# Altium PCB PCB_Microfonos.PcbDoc
Units mm, origin at the board's own origin, x right, y up, seen from the top; angles counter-clockwise.
Board outline 50 x 50 mm, 2 copper layers (Top Layer, Bottom Layer); 36 components, 19 nets, 90 pads, 10 vias.
Unrouted connection lines stored in the file: 4.
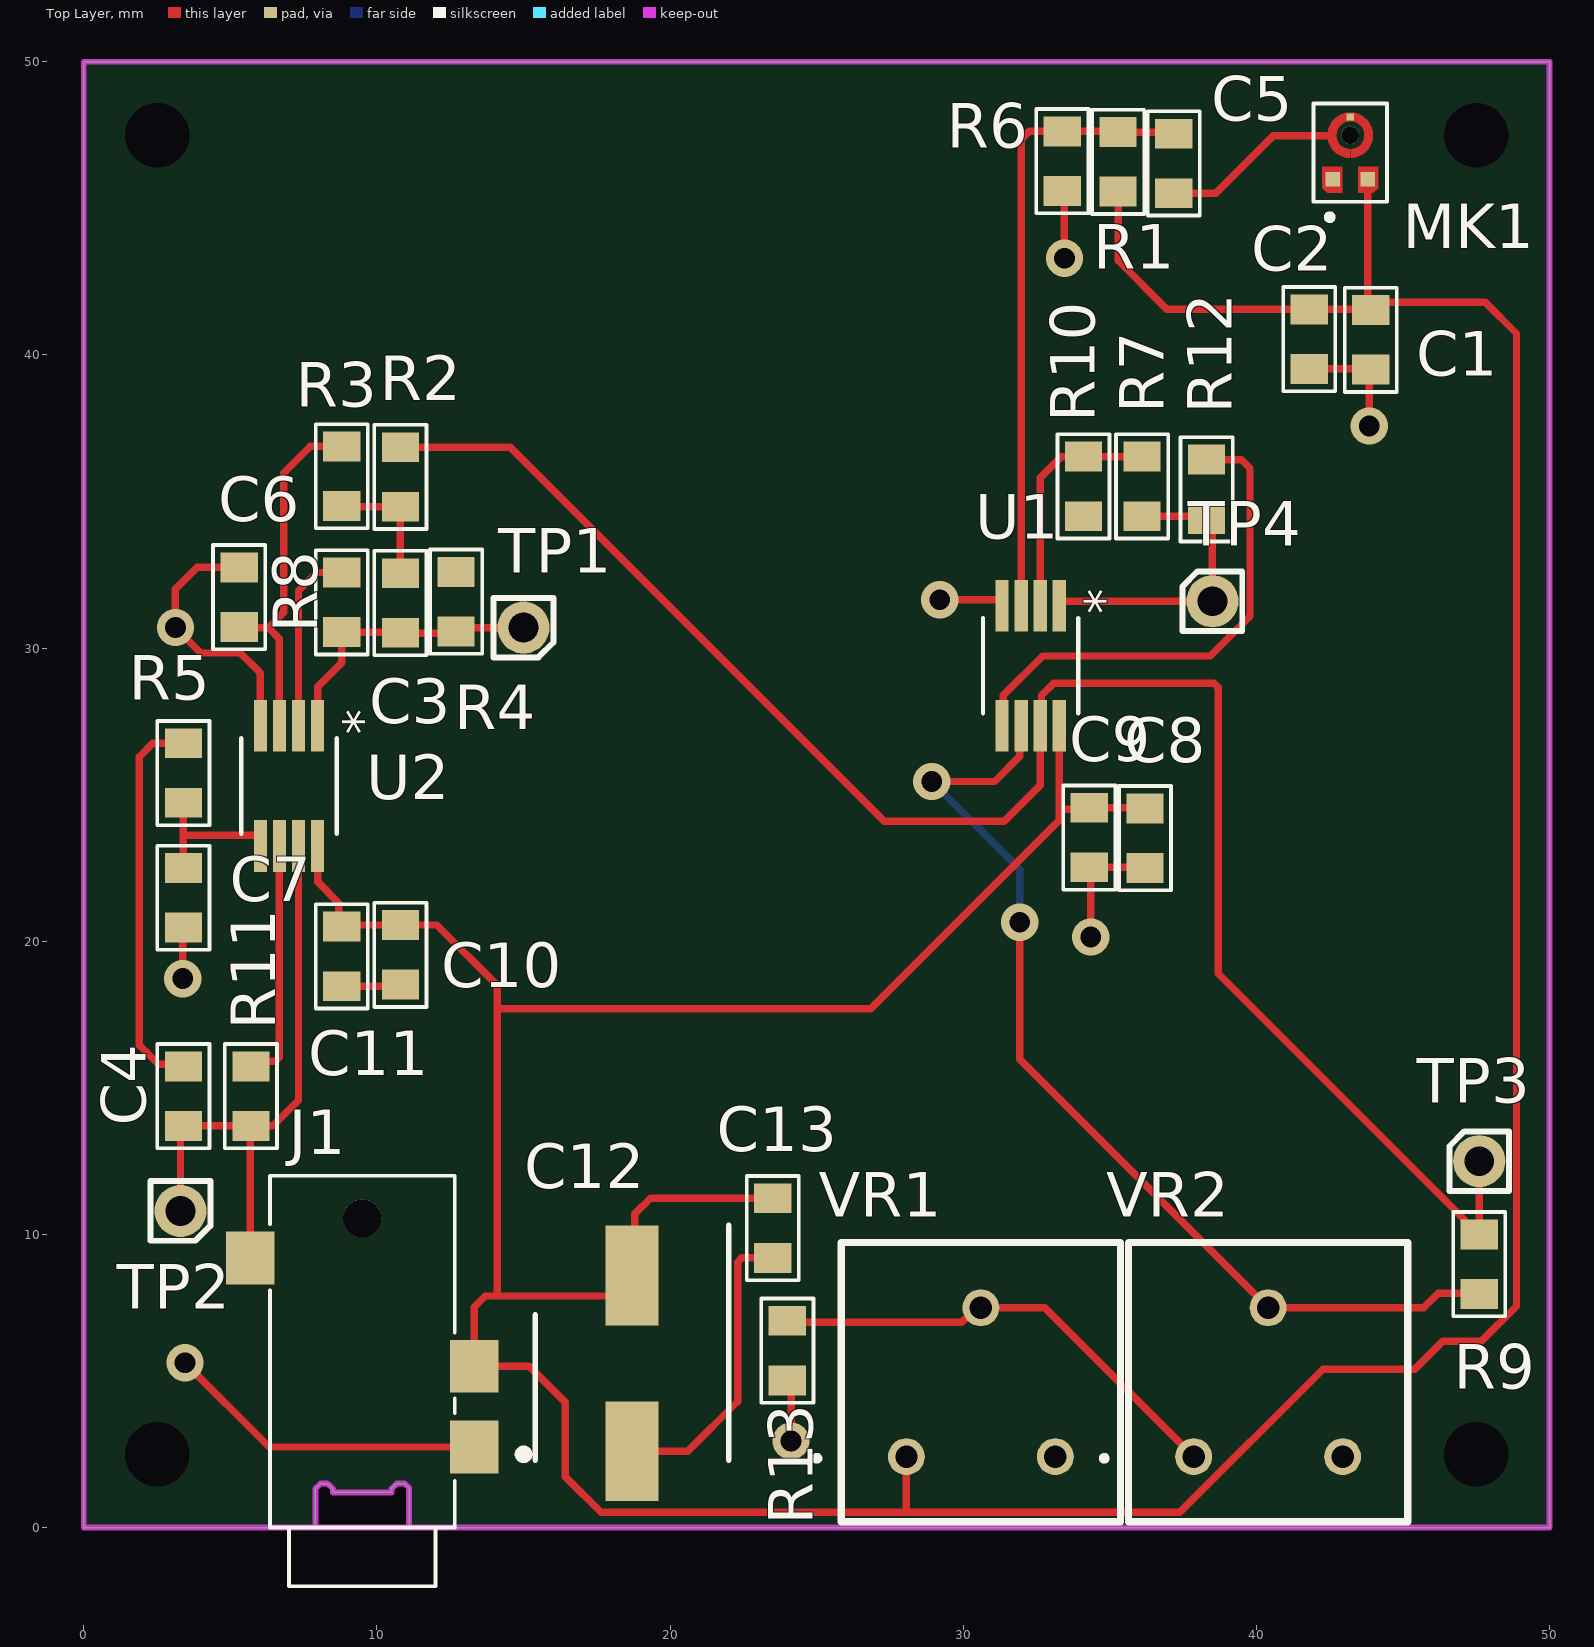
[diagram p0: Top Layer view]
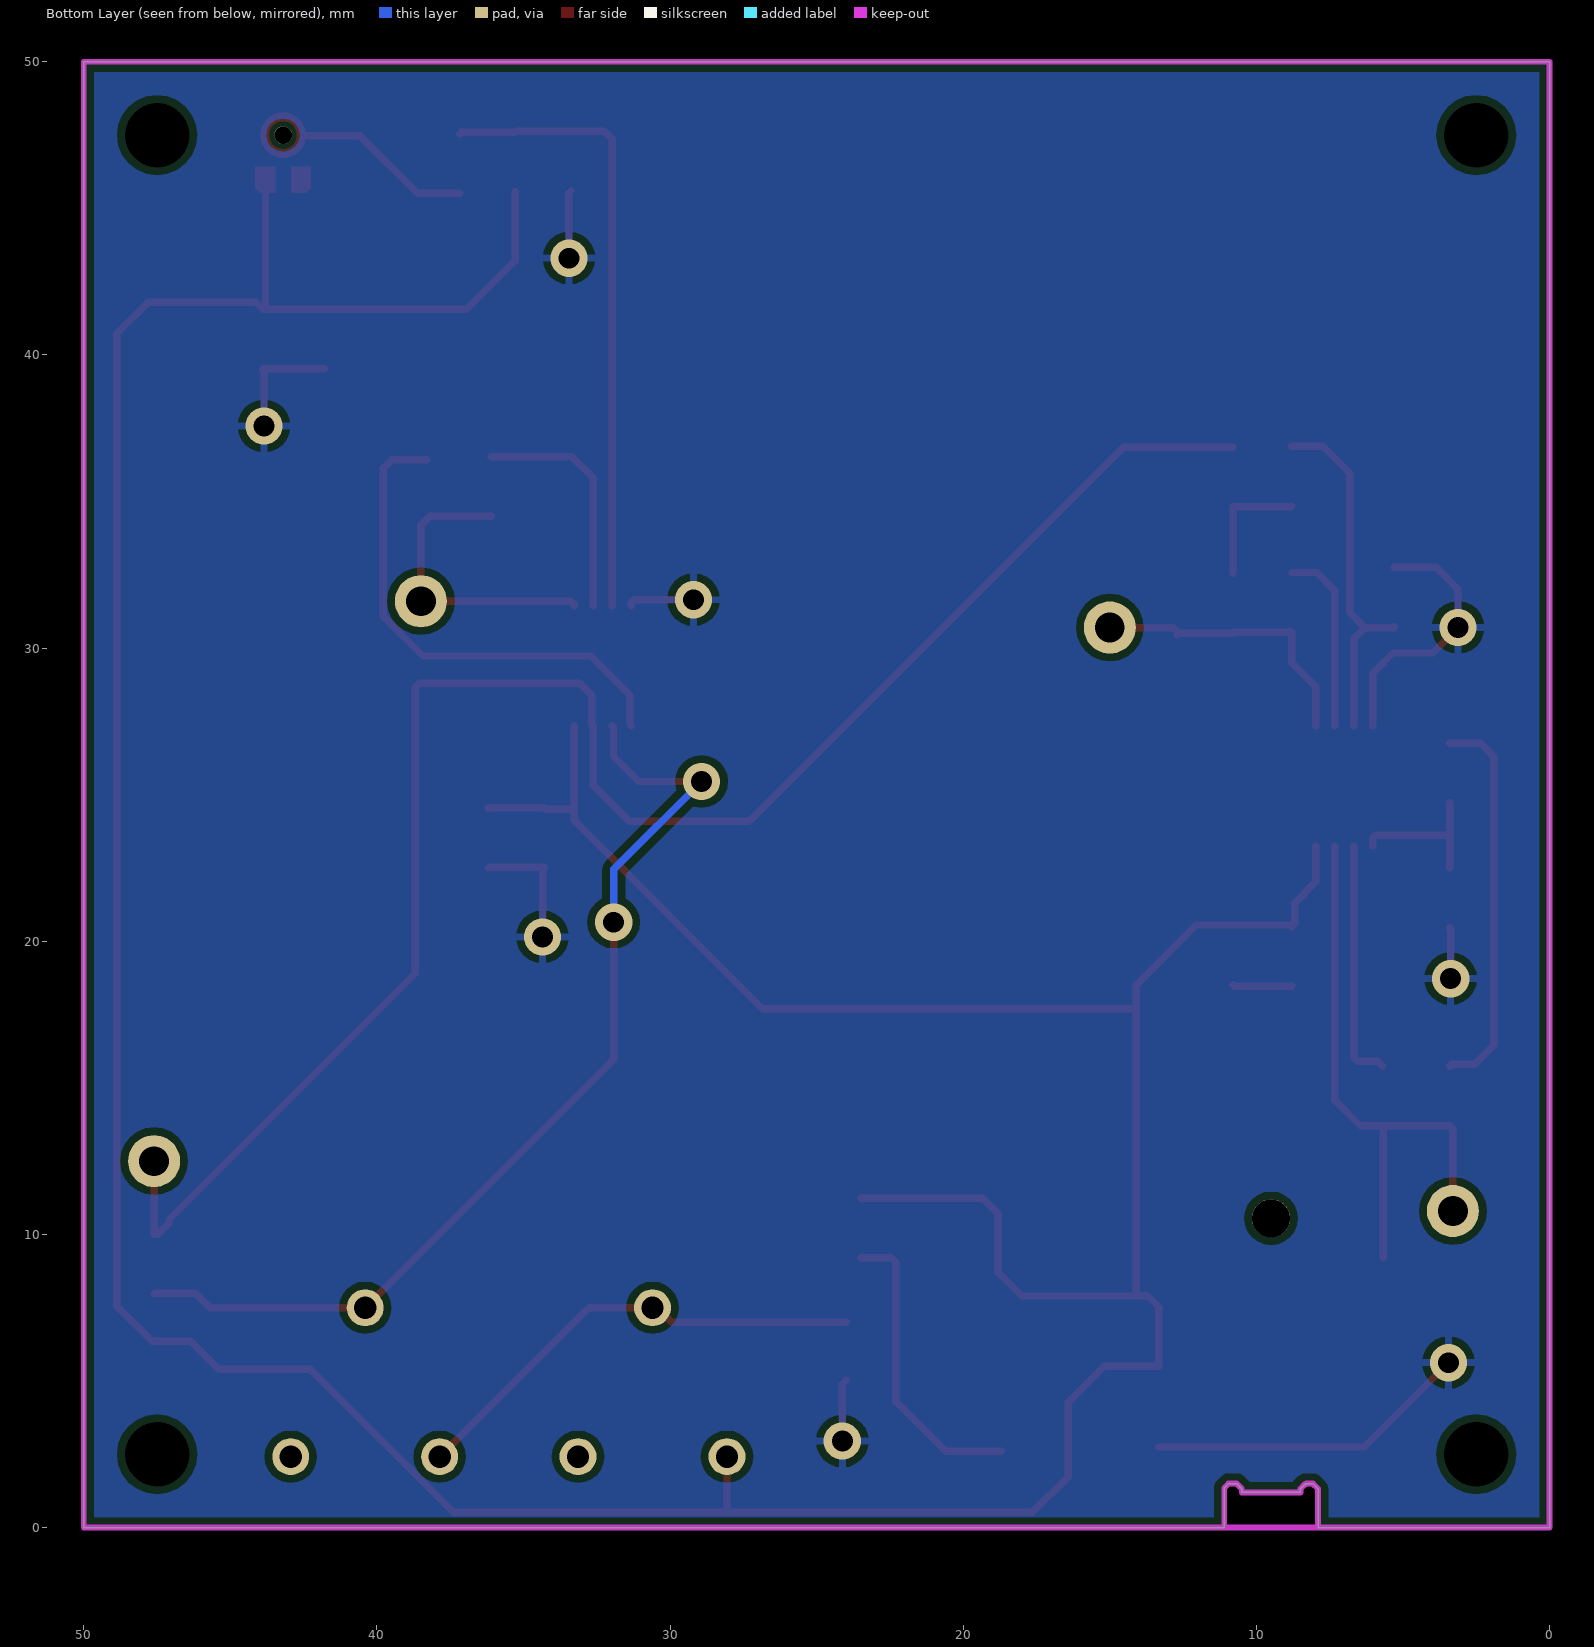
[diagram p1: Bottom Layer view, seen from below]

## Layer stack, top to bottom
Top Solder: solder mask 0.0102, Solder Resist, Dk 3.5
Top Layer: signal copper 0.0356
Dielectric 1: dielectric 0.32, FR-4, Dk 4.8
Bottom Layer: signal copper 0.0356
Bottom Solder: solder mask 0.0102, Solder Resist, Dk 3.5

## Board outline
10.5,1.2 10.5,1.325 10.675,1.5 10.95,1.5 11.1,1.35 11.1,0 50,0 50,50 0,50 0,0 7.9,0 7.9,1.325 8.075,1.5 8.3,1.5 8.325,1.475 8.35,1.475 8.5,1.325 8.5,1.2

## Design rules (kind name [scope] priority, off if disabled: settings)
Clearance [All] p1: gap=0.254 ignorepadtopadclearanceinfootprint=FALSE except(0: Arc-Hole Track-Hole SMDPad-Hole THPad-Hole Via-Hole Fill-Hole Poly-Hole Region-Hole Text-Hole)
HoleSize [All] p1: absolutevalues=TRUE maxlimit=6.3 minlimit=0.2 maxpercent=80.000 minpercent=20.000
PolygonConnect [All] p1: connectstyle=Relief reliefconductorwidth=0.254 reliefentries=4 polygonreliefangle="90 Angle" airgapwidth=0.254
RoomDefinition MICROFONO [InComponentClass('MICROFONO')] p1: confinementstyle=ConfineIn formatcopy=TRUE lockcomponents=FALSE outline 51.1,43.6 66.1,43.6 66.1,50.1 51.1,50.1
RoomDefinition "FILTRADO Y AMPLIFICACION" [InComponentClass('FILTRADO Y AMPLIFICACION')] p2: confinementstyle=ConfineIn formatcopy=TRUE lockcomponents=FALSE outline 51.1,29.1 221.1,29.1 221.1,42.6 51.1,42.6
RoomDefinition CONECTOR [InComponentClass('CONECTOR')] p3: confinementstyle=ConfineIn formatcopy=TRUE lockcomponents=FALSE outline 51.1,1.6 81.1,1.6 81.1,27.6 51.1,27.6
RoutingVias [All] p1: holewidth=0.711 width=1.27 viastyle="Through Hole" minholewidth=0.2 minwidth=0.45 maxholewidth=0.711 maxwidth=1.27
SolderMaskExpansion [All] p1: expansion=0.102 istentingtop=FALSE
Width [All] p1: maxlimit=0.254 minlimit=0.127 preferedwidth=0.254
29 further rules are at their usual default settings.

## Classes and differential pairs
component class MICROFONO: C1 C2 MK1
component class "FILTRADO Y AMPLIFICACION": C3 C4 C5 C6 C7 C8 C9 C10 C11 R1 R2 R3 R4 R5 R6 R7 R8 R9 R10 R11 R12 R13 TP1 TP2 TP3 TP4 U1 U2 VR1 VR2
component class CONECTOR: C12 C13 J1

## Components (designator, comment, footprint, x,y, rotation, side; value= is the part's Value field where it differs from the comment)
C1 "100nF" 0805C-TBD 43.9,41.278 r270 top
C2 "100p" 0805C-GENERIC 41.8,41.3 r270 top
C3 "3.6n" 0805C-GENERIC 10.8,32.3 r270 top
C4 "5.6n" 0805C-GENERIC 3.4,15.478 r270 top
C5 "3u" 0805C-GENERIC 37.18,45.77 r90 top
C6 "360p" 0805C-GENERIC 5.3,32.5 r270 top
C7 "470p" 0805C-GENERIC 3.4,20.722 r90 top
C8 "100n" 0805C-GENERIC 36.2,24.278 r270 top
C9 "100p" 0805C-GENERIC 34.3,24.3 r270 top
C10 "100n" 0805C-GENERIC 10.8,20.3 r270 top
C11 "100p" 0805C-GENERIC 8.8,20.246 r270 top
C12 "EEE-HC1C101XP" CAPAE660X800N 18.7,5.6 r270 top
C13 "10u" 0805C-GENERIC 23.5,10.978 r270 top
J1 "SJ2-35953A-SMT-TR" CUI_SJ2-35953A-SMT-TR 9.5,6 r90 top
MK1 "INMP510" XDCR_INMP510 43.2,46.9 r90 top
R1 "110k" 0805R-GENERIC 35.28,45.824 r90 top
R2 "1.6k" 0805R-GENERIC 10.8,36.6 r270 top
R3 "47k" 0805R-GENERIC 8.8,35.1 r90 top
R4 "5.1k" 0805R-GENERIC 12.7,30.822 r90 top
R5 "5.1k" 0805R-GENERIC 3.4,26.5 r270 top
R6 "1.8k" 0805R-GENERIC 33.38,47.37 r270 top
R7 "62k" 0805R-GENERIC 36.1,34.754 r90 top
R8 "51k" 0805R-GENERIC 8.8,30.8 r90 top
R9 "20k" 0805R-GENERIC 47.6,9.746 r270 top
R10 "2k" 0805R-GENERIC 34.1,36.278 r270 top
R11 "10k" 0805R-GENERIC 5.7,13.954 r90 top
R12 "5.6k" 0805R-GENERIC 38.3,36.178 r270 top
R13 "820" 0805R-GENERIC 24,6.8 r270 top
TP1 "LPFE1" TESTPIN 15,30.7 r180 top
TP2 "LPFE2" TESTPIN 3.3,10.8 r180 top
TP3 "AMP" TESTPIN 47.6,12.5 r0 top
TP4 "HPF" TESTPIN 38.5,31.6 r0 top
U1 "Part Number: ADA4661-2ARMZ-R7" RM_8 32.3,29.4 r270 top value=Value
U2 "Part Number: ADA4661-2ARMZ-R7" RM_8 7,25.3 r270 top value=Value
VR1 "3310Y-001-102L" 3310Y-001 30.6,4.96 r0 top
VR2 "3310Y-001-103L" 3310Y-001 40.4,4.96 r0 top

## Footprints (in the part's own frame and the unit in brackets; to place one, negate y for a bottom-side part, rotate by r counter-clockwise, add the part's x,y. Pads: shape width x height; smd on the part's side, far side on the other; paste and mask are expansions set on the pad)
0805C-GENERIC [mil] "CAPACITOR 0805"
  rect 40x50 smd: 1(-10,0) 2(70,0)
  silkscreen extent -40,-35 100,35, body extent -11,-25 70,25, height 26
0805C-TBD [mil] "CAPACITOR 0805"
  rect 40x50 smd: 1(-10,0) 2(70,0)
  silkscreen extent -40,-35 100,35, body extent -11,-25 70,25, height 26
0805R-GENERIC [mil] "RESISTOR 0805"
  rect 40x50 smd: 1(-10,0) 2(70,0)
  silkscreen extent -40,-35 100,35, body extent -11,-25 70,25, height 27
3310Y-001 [mm]
  round 1.26 hole 0.76: 1(-2.54,-2.54) 2(0,2.54) 3(2.54,-2.54)
  silkscreen extent -5.65,-4.76 4.76,4.76, body extent -4.7,-4.76 4.83,4.76, height 6.38
CAPAE660X800N [mm]
  rect 3.4x1.8 smd: 1(-3,0) 2(3,0)
  silkscreen extent -4.7,-3.3 3.3,3.3, body extent -3.9,-3.4 3.9,3.4, height 8
CUI_SJ2-35953A-SMT-TR [mm]
  rect 1.8x1.65 smd: 1(-3.25,-3.825) 2(3.2,3.825) 3(-0.5,-3.825)
  round 1.3 hole 1.3 unplated: ""(4.55,0)
  silkscreen extent -8,-5.65 6,3.15
RM_8 [mm]
  rect 1.761x0.451 smd paste+0 mask+0: 1(-2.05,0.975) 2(-2.05,0.325) 3(-2.05,-0.325) 4(-2.05,-0.975) 5(2.05,-0.975) 6(2.05,-0.325) 7(2.05,0.325) 8(2.05,0.975)
  silkscreen extent -1.63,-1.63 1.63,1.63, body extent 0,0 0.25,0.25, height 0.25
TESTPIN [mil]
  round 70 hole 40: 1(0,0)
  silkscreen extent -40,-40 40,40, body extent -40,-40 40,40, height 470
XDCR_INMP510 [mm]
  rect 0.5x0.5 smd paste-1 mask+0: 1(-0.905,0.6) 2(-0.905,-0.6)
  rect 0.25x0.25 smd paste-1 mask+0: 3(1.215,0)
  round 0.6 hole 0.6 unplated: ""(0.595,0)
  Top Layer region: 248 vertices and 0 holes, not listed, extent -0.18,-0.77 1.37,0.77
  Top Layer region: -0.475,-0.95 -1.215,-0.95 -1.375,-0.79 -1.375,-0.27 -0.475,-0.27
  Top Layer region: -0.475,0.27 -1.375,0.27 -1.375,0.79 -1.215,0.95 -0.475,0.95
  silkscreen extent -2.3,-1.25 1.68,1.25

## Part data
C1: library part 0805C-100nF-25V-X7R-MUR, "CAPACITOR 0805 CERAMIC", Supplier Part Number 1=490-1673-1-ND, Supplier 1=Digi-Key
C2 C3 C4 C5 C6 C7 C8 C9 C10 C11 C13: library part C0805-GENERIC, "GENERIC CAPACITOR NON POLARISED0603"
C12: "Capacitor Polarised", Manufacturer_Name=Panasonic, Mouser Part Number=667-EEE-HC1C101XP, Allied Price/Stock=https://www.alliedelec.com/panasonic-eee-hc1c101xp/70258549/, Allied_Number=70258549, Datasheet Link=http://industrial.panasonic.com/www-cgi/jvcr13pz.cgi?E+PZ+3+ABA0109+EEEHC1C101XP+7+WW, Height=8mm, Manufacturer_Part_Number=EEE-HC1C101XP, Mouser Price/Stock=https://www.mouser.com/Search/Refine.aspx?Keyword=667-EEE-HC1C101XP
J1: "3.5 mm, Stereo, Right Angle, Surface Mount _SMT_, Audio Jack Connector", Package=None, Availability=Unavailable, CUI_purchase_URL=https://www.cuidevices.com/product/interconnect/connectors/audio-connectors/jacks/sj2-3595x-smt-series?utm_source=snapeda.com&utm_medium=referral&utm_campaign=snapedaBOM, MF="CUI Devices", MP=SJ2-35953A-SMT-TR, Price=None, SnapEDA_Link=https://www.snapeda.com/parts/SJ2-35953A-SMT-TR/CUI%20Devices/view-part/701771/?ref=snap
MK1: "60Hz ~ 20kHz Analog Microphone MEMS _Silicon_ 1.5V ~ 3.63V Omnidirectional _-38dB Â±2dB @ 94dB SPL_ Solder Pads", Package="LGA-3 TDK-InvenSense", Digi-Key_Part_Number=1428-1016-2-ND, Digi-Key_Purchase_URL=https://www.digikey.com/product-detail/en/tdk-invensense/INMP510ACEZ-R7/1428-1016-2-ND/4311534?utm_source=snapeda&utm_medium=aggregator&utm_campaign=symbol, MF="TDK InvenSense", MP=INMP510, SnapEDA_Link=https://www.snapeda.com/parts/INMP510/TDK%20InvenSense/view-part/2757133/?ref=snap
R1 R2 R3 R4 R5 R6 R7 R8 R9 R10 R11 R12 R13: library part R0805-GENERIC, "GENERIC RESISTOR 0805"
TP1 TP2 TP3 TP4: library part TESTPIN, "TESTPIN SINGLE PIN HEADER", Manufacturer 1="Sharon Long Industries", Manufacturer Part Number 1=Cut-it-yourself, Supplier 1 Part number=Cut-It-Yourself, Reel=TH, Supplier 1="Sharon Long Industries"
U1 U2: library part ADA4661-2ARMZ-R7, "No Description Available", Built_By=EMA_Christopher, Copyright="Copyright (C) 2016 Accelerated Designs. All rights reserved", Manufacturer_Part_Number=ADA4661-2ARMZ-R7, RefDes=RefDes, Type=DEV, Vendor="Analog Devices Inc"
VR1: library part 3310Y-001-103L, "Variable Resistor", Manufacturer_Name=Bourns, Mouser Part Number=652-3310Y-001-103L, RS Part Number=5220625P, Datasheet Link=http://www.bourns.com/docs/Product-Datasheets/3310.pdf, Manufacturer_Part_Number=3310Y-001-103L, Mouser Price/Stock=https://www.mouser.com/Search/Refine.aspx?Keyword=652-3310Y-001-103L, RS Price/Stock=http://uk.rs-online.com/web/p/products/5220625P
VR2: "Variable Resistor", Manufacturer_Name=Bourns, Mouser Part Number=652-3310Y-001-103L, RS Part Number=5220625P, Datasheet Link=http://www.bourns.com/docs/Product-Datasheets/3310.pdf, Manufacturer_Part_Number=3310Y-001-103L, Mouser Price/Stock=https://www.mouser.com/Search/Refine.aspx?Keyword=652-3310Y-001-103L, RS Price/Stock=http://uk.rs-online.com/web/p/products/5220625P

## Free pads (board coordinates)
  round 1.524 hole 2.2 unplated: ""(2.5,2.5) ""(2.5,47.5) ""(47.5,2.5) ""(47.5,47.5)

## Via types
v1: diameter 1.27, hole 0.711, Top Layer to Bottom Layer, 10 vias

## Nets (pads, with @x,y where several pads share a name; then routed paths per layer and width w, separated by ;. In a path a pad name is that pad's centre, name@x,y a point inside that pad or via, vN(x,y) a via of type N, cw(c..) or ccw(c..) an arc to the next point about the centre after c; other vN are vias at no path point)
GND: C1.2 C2.2 C6.1 C7.1 C8.2 C9.2 C10.2 C11.2 J1.1 MK1.1 R6.2 R10.2 R13.2 U1.4 U2.4 | length 39
  Top Layer w0.254: v1(3.375,18.725) 3.375,20.443 C7.1 ; v1(3.45,5.625) 6.325,2.75 J1.1 ; C6.1 3.871,32.754 3.125,32.008 v1(3.125,30.7) 3.992,29.833 5.342,29.833 5.951,29.224 6.025,29.15 U2.4 ; C11.2 10.746,18.468 C10.2 ; R13.2 24.125,4.897 v1(24.125,2.95) ; v1(29.2,31.65) 31.227,31.65 31.325,31.552 U1.4 ; R6.2 33.45,45.522 v1(33.45,43.3) ; v1(34.35,20.15) 34.35,22.472 C9.2 36.178,22.522 C8.2 ; C2.2 43.878,39.522 C1.2 43.85,39.45 v1(43.85,37.575)
In_E1: C6.2 R3.2 U2.3 | length 12.4
  Top Layer w0.254: C6.2 5.322,30.7 6.3,30.7 ; U2.3 6.675,30.325 6.3,30.7 ; R3.2 7.722,36.878 6.817,35.973 6.817,31.217 6.3,30.7
In_E2: C7.2 R5.2 U2.5 | length 5.2
  Top Layer w0.254: C7.2 3.4,23.611 ; R5.2 3.4,23.611 ; U2.5 6.025,23.513 5.927,23.611 3.4,23.611
In_HP: C5.2 R1.2 R6.1 U1.3 | length 21.3
  Top Layer w0.254: U1.3 31.975,47.35 32.249,47.624 R6.1 35.258,47.624 R1.2 37.126,47.602 C5.2
NetC3_1: C3.1 R2.2 R3.1 | length 4.3
  Top Layer w0.254: R3.1 8.824,34.822 R2.2 C3.1
NetC4_1: C4.1 R4.2 R5.1 | length 13.3
  Top Layer w0.254: C4.1 3.332,15.8 2.549,15.8 1.9,16.449 1.9,26.3 2.354,26.754 R5.1
NetC5_1: C5.1 MK1.3 | length 6.2
  Top Layer w0.254: C5.1 38.616,45.516 40.58,47.48 42.43,47.48 42.519,47.48
NetC12_2: C12.2 C13.2 | length 10.3
  Top Layer w0.254: C12.2 20.6,2.6 22.3,4.3 22.3,9.051 22.449,9.2 C13.2
NetR7_2: R7.2 R10.1 U1.2 | length 8.1
  Top Layer w0.254: U1.2 32.625,35.808 33.349,36.532 R10.1 R7.2
NetR8_2: R8.2 U2.2 | length 6.3
  Top Layer w0.254: U2.2 7.325,31.954 7.949,32.578 R8.2
NetR9_2: R9.2 U1.6 VR2.2 | length 34.5
  Top Layer w0.254: v1(28.925,25.45) 31.07,25.45 31.931,26.312 31.931,27.306 U1.6 ; v1(31.925,20.65) 31.925,15.975 VR2.2 45.7,7.5 46.2,8 47.568,8 R9.2
  Bottom Layer w0.254: v1(28.925,25.45) 31.925,22.45 v1(31.925,20.65)
NetR11_2: R11.2 U2.6 | length 8.3
  Top Layer w0.254: R11.2 5.868,15.9 6.526,15.9 6.675,16.049 U2.6
NetR12_1: R12.1 U1.5 | length 17.2
  Top Layer w0.254: U1.5 31.369,27.394 31.369,28.388 32.711,29.731 38.427,29.731 39.78,31.084 39.78,36.136 39.484,36.432 R12.1
NetR13_1: R13.1 VR1.2 VR2.1 | length 16.2
  Top Layer w0.254: R13.1@23.995,7 29.948,7 30.448,7.5 32.78,7.5 VR2.1
Out_A: R2.1 R9.1 TP3.1 U1.7 | length 61.9
  Top Layer w0.254: R2.1 14.546,36.854 27.3,24.1 31.4,24.1 32.625,25.325 U1.7 32.669,27.394 32.669,28.388 33.08,28.8 38.551,28.8 38.7,28.651 38.7,18.9 47.092,10.508 47.092,10.381 47.473,10 R9.1 TP3.1
Out_E1: C3.2 R4.1 R8.1 TP1.1 U2.1 | length 9.8
  Top Layer w0.254: U2.1 7.975,28.675 8.8,29.5 R8.1 10.754,30.546 10.8,30.5 12.646,30.5 R4.1@12.7,30.446 ; R4.1 12.832,30.7 TP1.1
Out_E2: C4.2 J1.2 R11.1 TP2.1 U2.7 | length 20.4
  Top Layer w0.254: TP2.1 3.3,13.6 C4.2 5.65,13.7 R11.1@5.675,13.675 ; J1.2 R11.1@5.675,13.675 ; U2.7 7.325,14.574 6.451,13.7 R11.1 R11.1@5.675,13.675
Out_HP: R7.1 R12.2 TP4.1 U1.1 | length 10.4
  Top Layer w0.254: U1.1 33.275,31.502 33.373,31.6 TP4.1 38.5,34.2 R12.2 38.2,34.5 R7.1
VCC: C1.1 C2.1 C8.1 C9.1 C10.1 C11.1 C12.1 C13.1 J1.3 MK1.2 R1.1 U1.8 U2.8 VR1.1 | length 161.6
  Top Layer w0.254: U2.8 7.975,22.025 8.7,21.3 8.7,20.6 C11.1 8.854,20.554 C10.1 12.046,20.554 14.1,18.5 14.1,17.7 ; C13.1 19.332,11.232 18.8,10.7 18.8,8.7 C12.1 18,7.9 14.1,7.9 ; VR1.1 28.06,0.559 28.1,0.519 ; U1.8 33.275,24.6 ; R1.1 35.28,43.22 36.946,41.554 C2.1 C1.1@43.878,41.554 ; C8.1 36.178,24.554 C9.1 34.246,24.5 33.375,24.5 33.275,24.6 ; MK1.2 43.8,41.632 C1.1@43.878,41.554 ; 14.1,7.9 14.1,17.7 ; 14.1,7.9 13.7,7.9 13.325,7.525 J1.3 15.2,5.5 16.421,4.279 16.421,1.74 17.642,0.519 28.1,0.519 ; 14.1,17.7 26.849,17.7 33.275,24.126 33.275,24.6 ; 28.1,0.519 37.389,0.519 42.27,5.4 45.4,5.4 46.351,6.351 47.665,6.351 48.87,7.556 48.87,40.73 47.8,41.8 44.124,41.8 C1.1@43.878,41.554
pads on no net: J1. MK1. VR1.3 VR2.3

## Polygon pours and split planes (outlines as drawn)
GND on Bottom Layer "GND_L01_P000" (solid, remove dead copper, pour order 0): 0,0 0,50 50,50 50,0

## Keep-outs
Keep-Out Layer:
  lines w0.2: 0,0 7.9,0 ; 0,0 0,50 ; 0,0 7.9,0 ; 0,0 0,50 ; 0,0 50,0 ; 0,0 0,50 ; 0,0 50,0 ; 0,0 0,50 ; 0,50 50,50 ; 0,50 50,50 ; 0,50 50,50 ; 0,50 50,50 ; 7.9,0 7.9,1.325 ; 7.9,0 7.9,1.325 ; 7.9,1.325 8.075,1.5 ; 7.9,1.325 8.075,1.5 ; 8.075,1.5 8.3,1.5 ; 8.075,1.5 8.3,1.5 ; 8.3,1.5 8.325,1.475 ; 8.3,1.5 8.325,1.475 ; 8.325,1.475 8.35,1.475 ; 8.325,1.475 8.35,1.475 ; 8.35,1.475 8.5,1.325 ; 8.35,1.475 8.5,1.325 ; 8.5,1.2 10.5,1.2 ; 8.5,1.2 8.5,1.325 ; 8.5,1.2 10.5,1.2 ; 8.5,1.2 8.5,1.325 ; 10.5,1.2 10.5,1.325 ; 10.5,1.2 10.5,1.325 ; 10.5,1.325 10.675,1.5 ; 10.5,1.325 10.5,1.325 ; 10.5,1.325 10.675,1.5 ; 10.5,1.325 10.5,1.325 ; 10.675,1.5 10.95,1.5 ; 10.675,1.5 10.95,1.5 ; 10.95,1.5 11.1,1.35 ; 10.95,1.5 11.1,1.35 ; 11.1,0 50,0 ; 11.1,0 11.1,1.35 ; 11.1,0 50,0 ; 11.1,0 11.1,1.35 ; 50,0 50,50 ; 50,0 50,50 ; 50,0 50,50 ; 50,0 50,50

## Text inside footprints (layer, text, board x,y; h text height)
J1: Mechanical 13 "PCB Edge" at 2.486,-9.73 h1.27 r90
U1: Top Overlay "*" at 33.599,32.022 h1.27 r270; Mechanical 13 "*" at 32.454,30.837 h1.27 r270
U2: Top Overlay "*" at 8.299,27.921 h1.27 r270; Mechanical 13 "*" at 7.154,26.736 h1.27 r270